# Altium PCB PCB1.PcbDoc (part 1 of 2)
Units mil, origin at the board's own origin, x right, y up, seen from the top; angles counter-clockwise.
Board outline 6000 x 4000 mil, 2 copper layers (Top Layer, Bottom Layer); 288 components, 201 nets, 886 pads, 6 vias.
Unrouted connection lines stored in the file: 611.
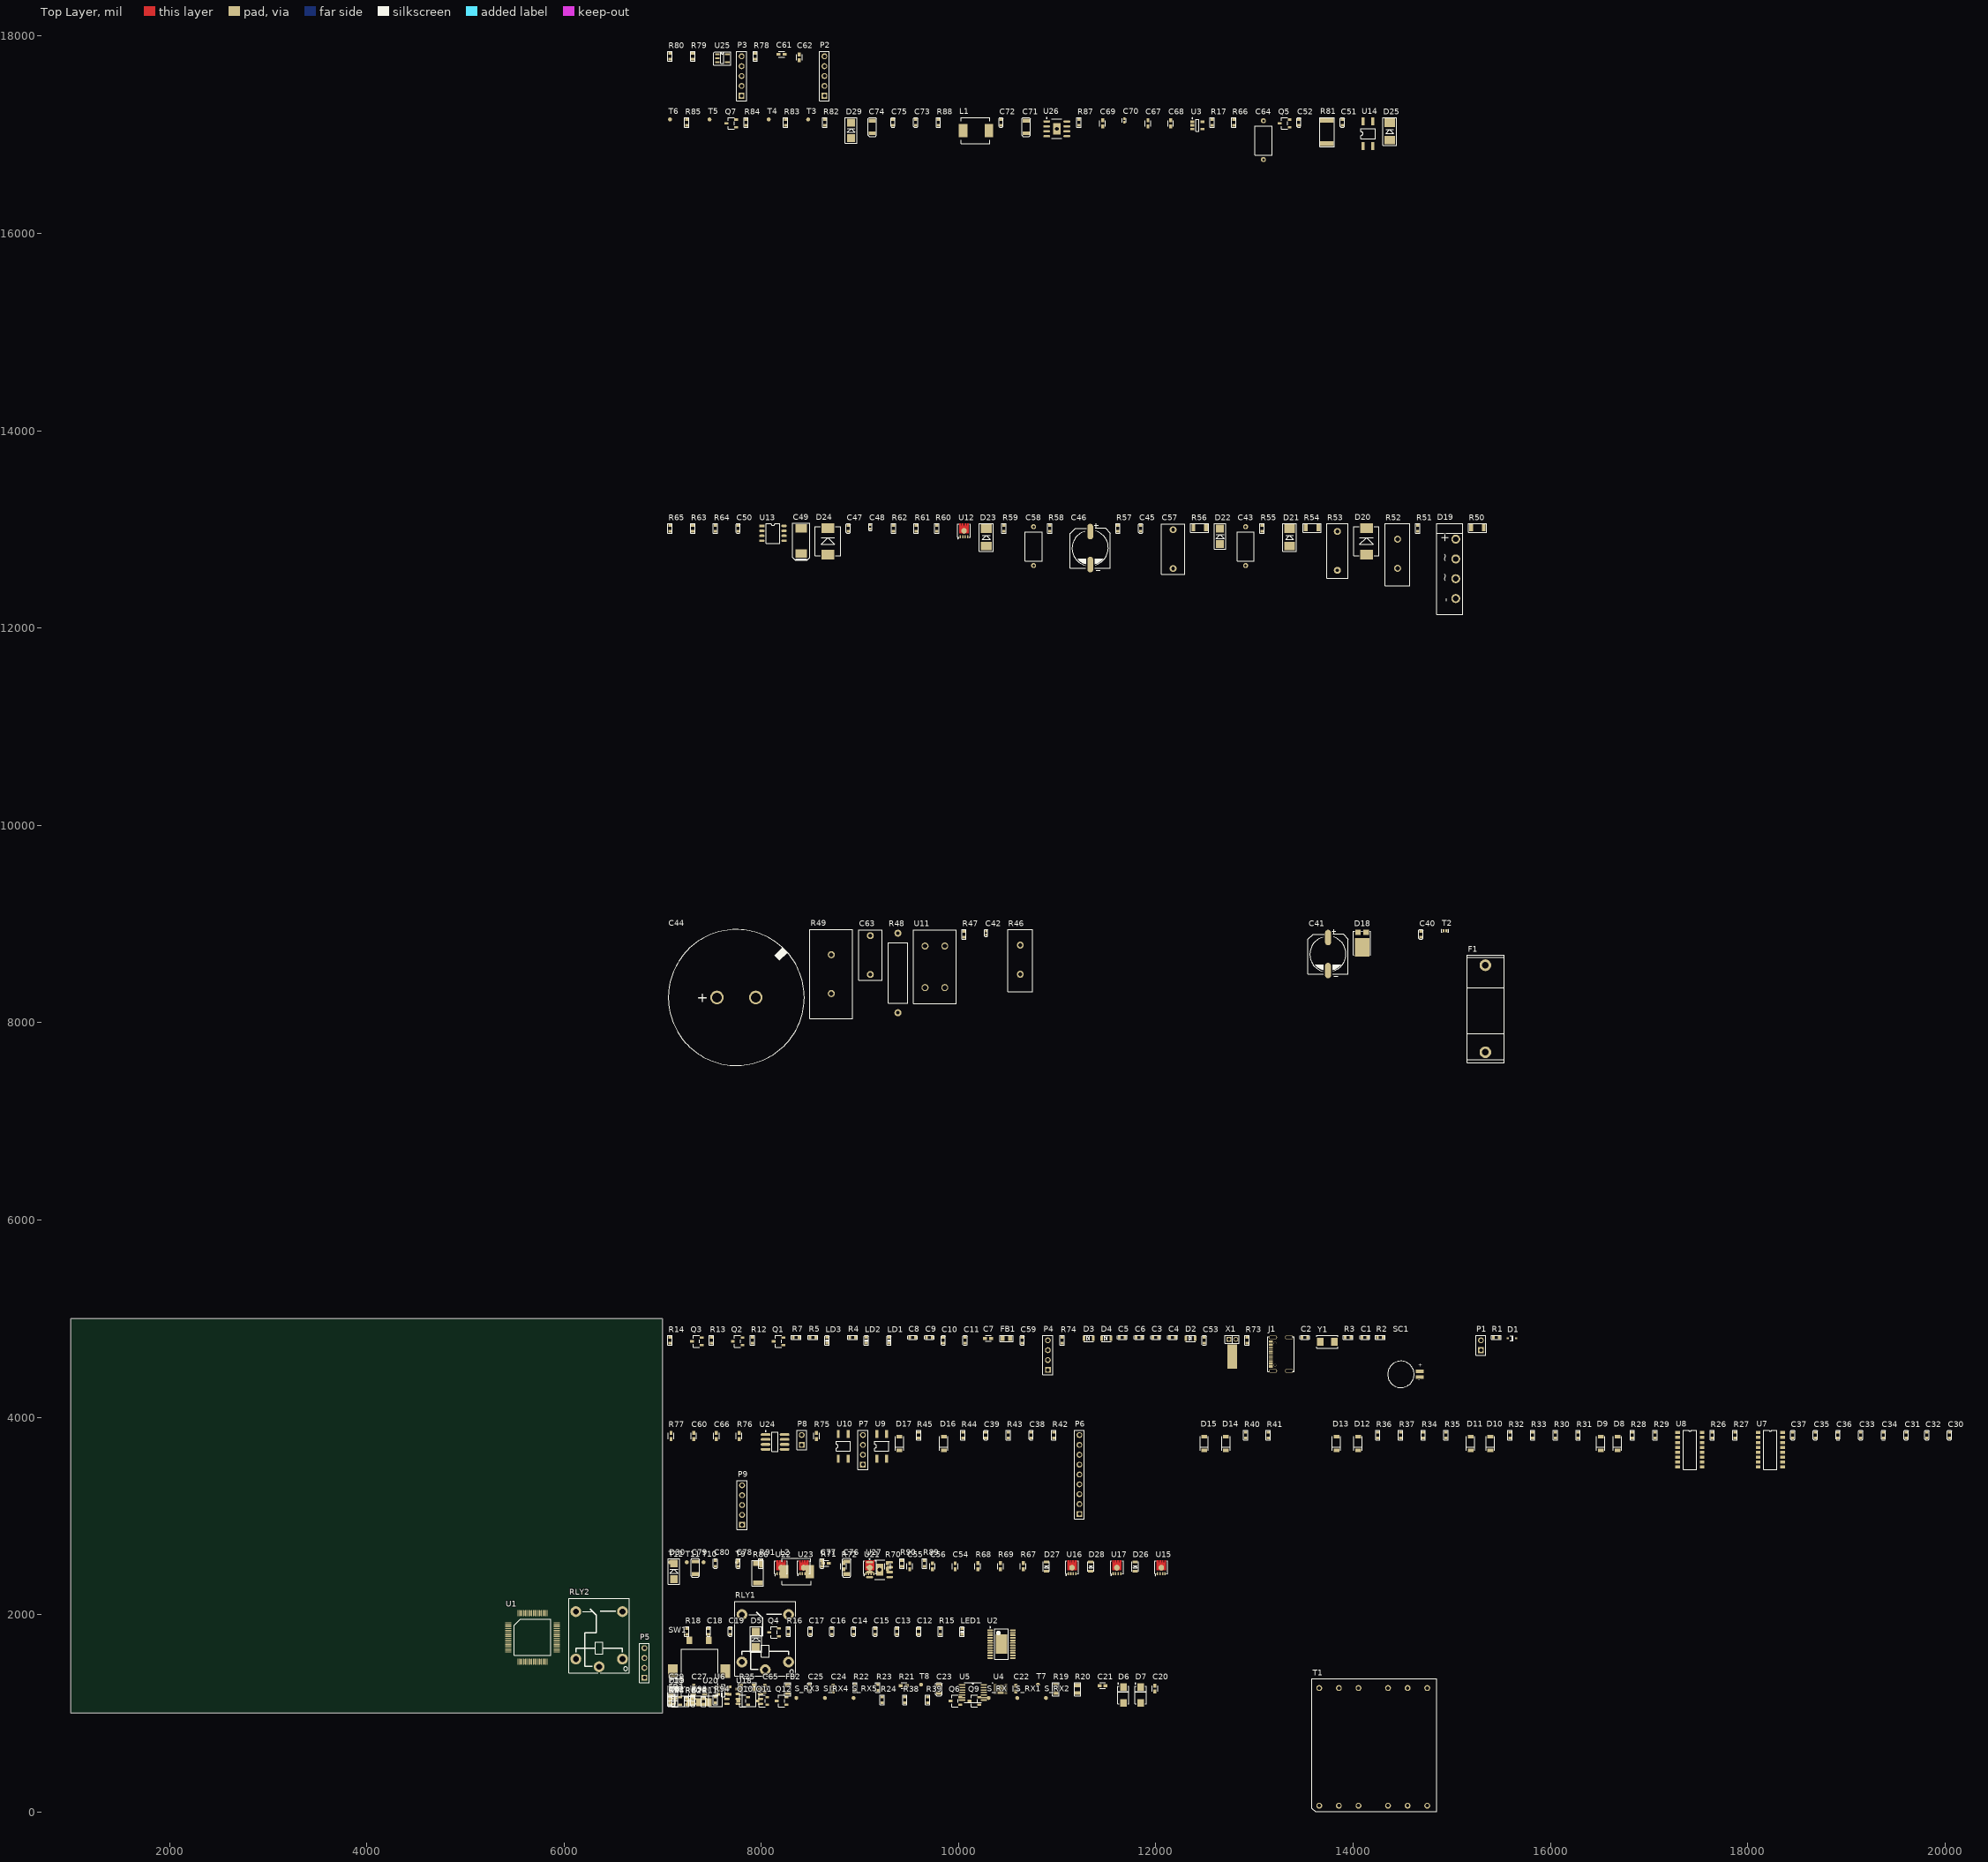
[diagram p0: Top Layer view]
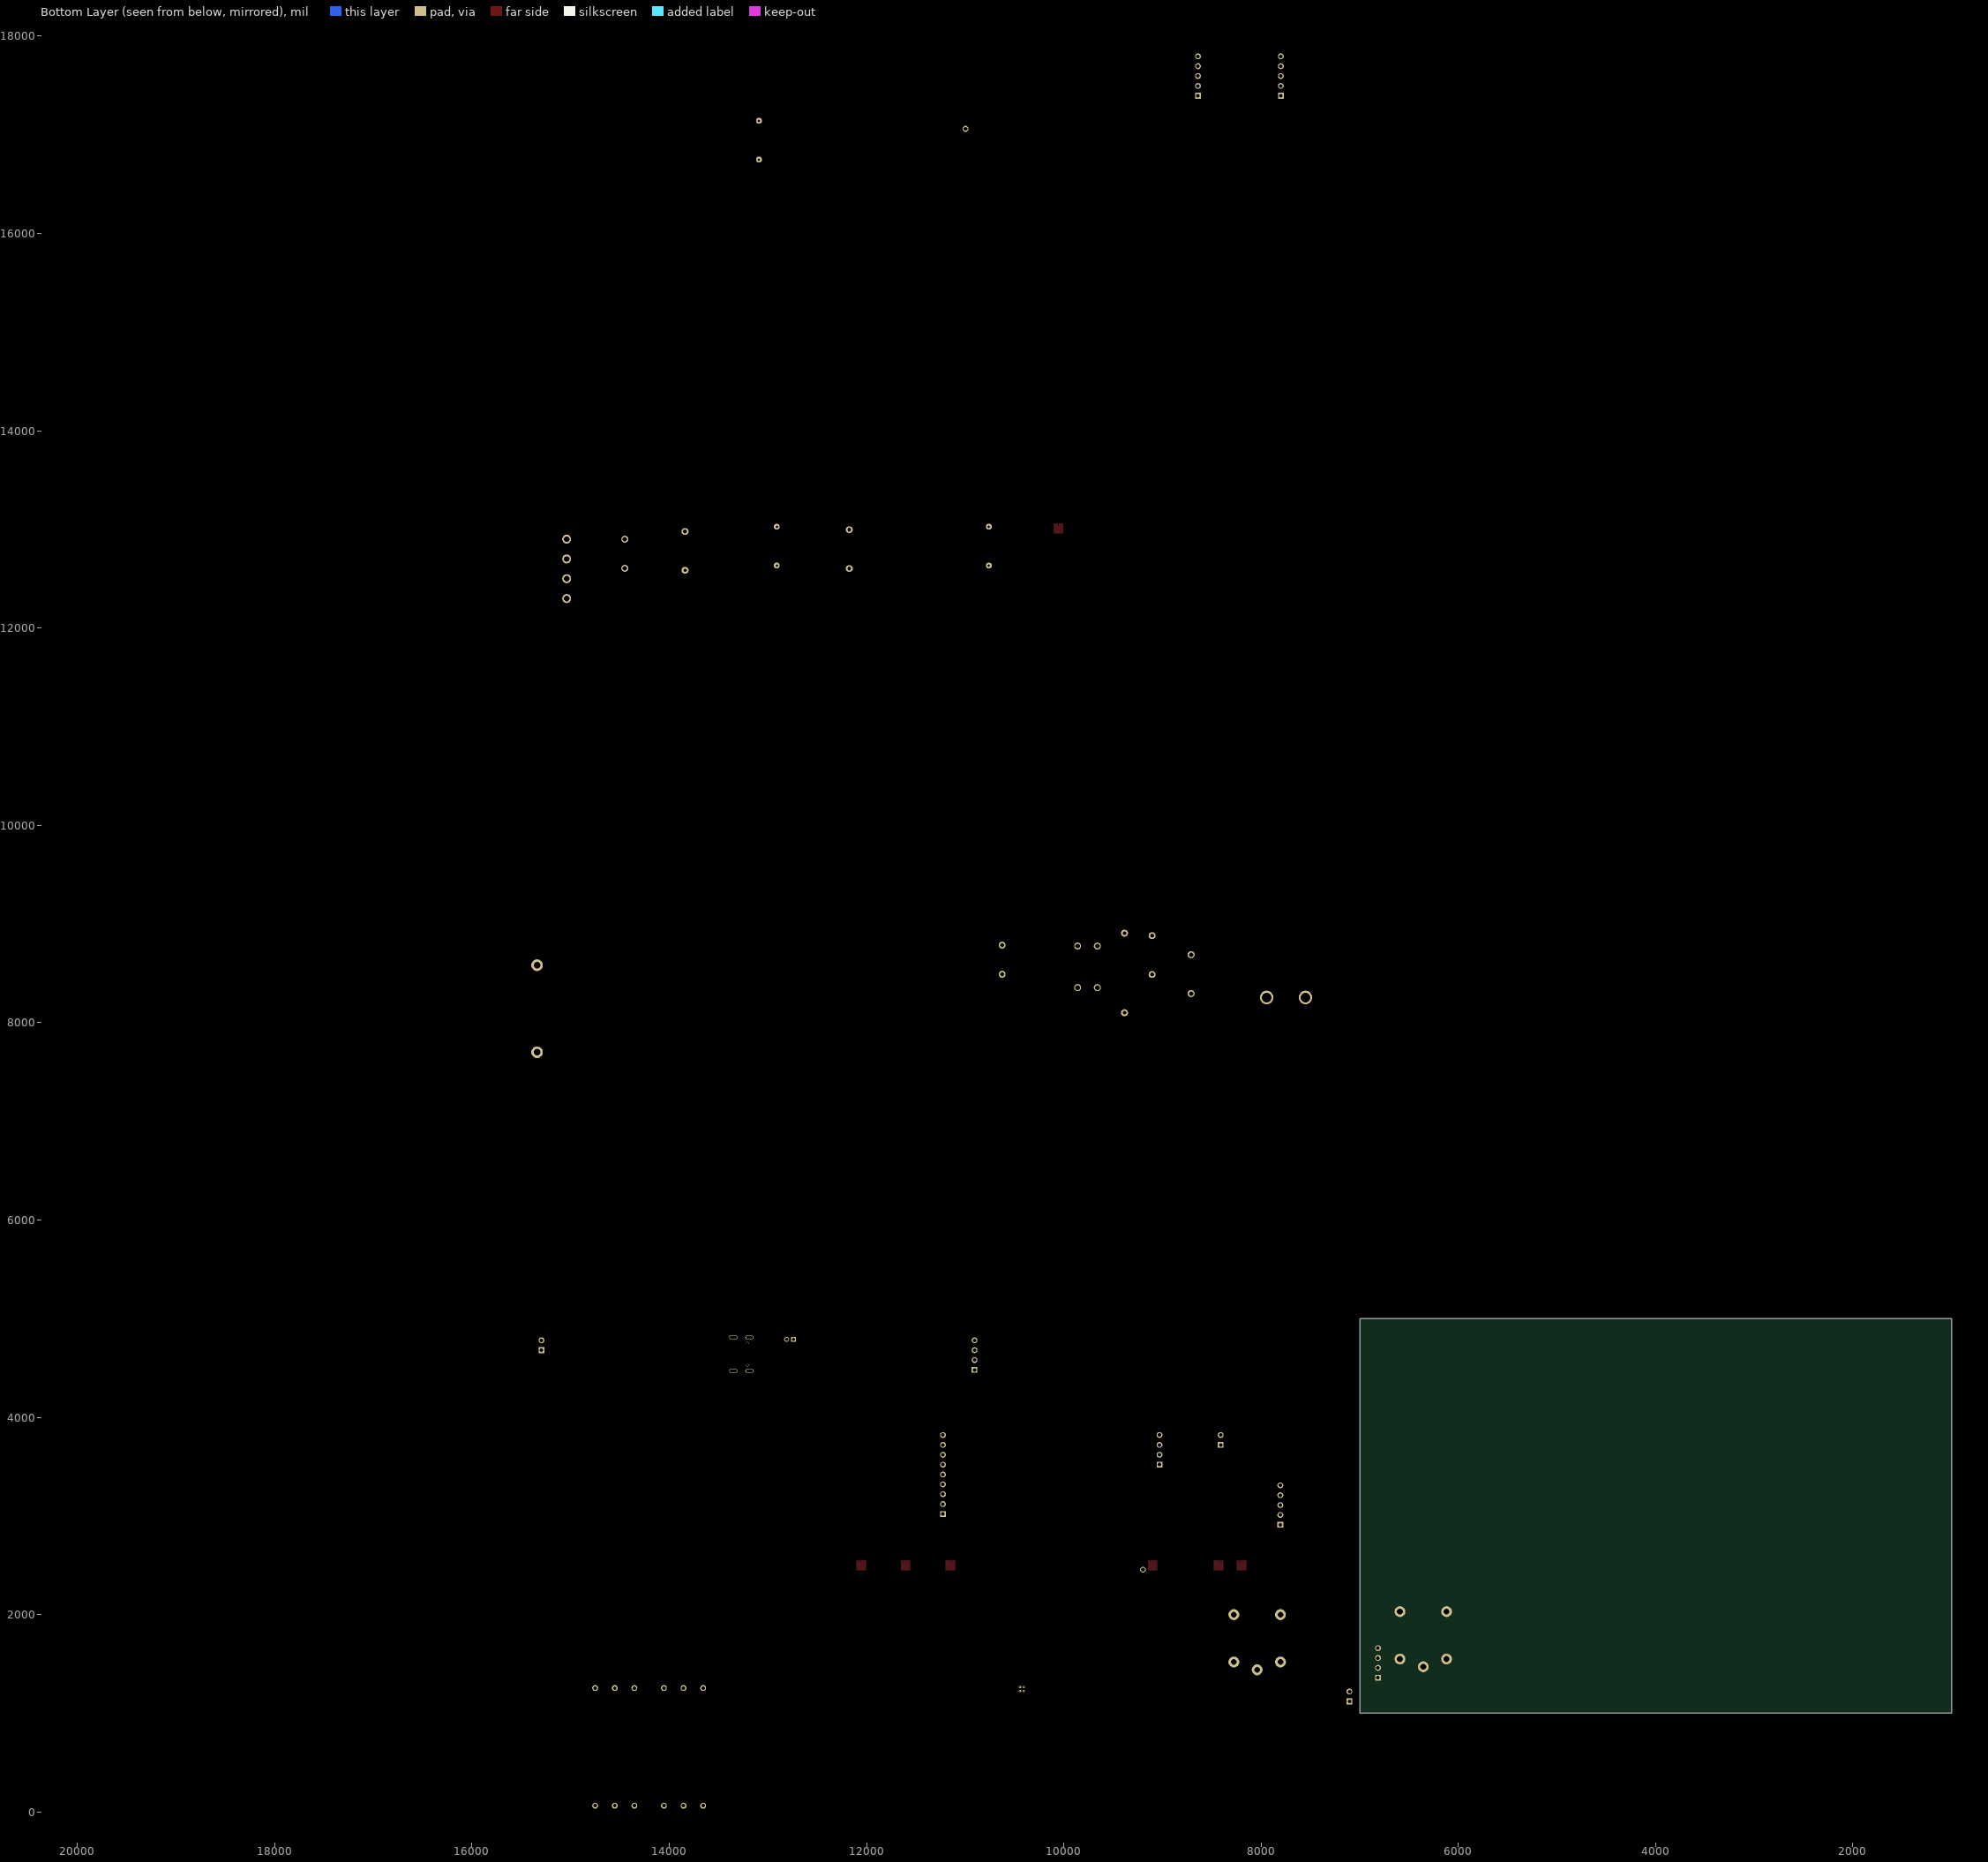
[diagram p1: Bottom Layer view, seen from below]

## Layer stack, top to bottom
Top Solder: solder mask 0.4, Solder Resist, Dk 3.5
Top Layer: signal copper 1.4
Dielectric 1: dielectric 12.6, FR-4, Dk 4.8
Bottom Layer: signal copper 1.4
Bottom Solder: solder mask 0.4, Solder Resist, Dk 3.5

## Board outline
1000,1000 7000,1000 7000,5000 1000,5000

## Design rules (kind name [scope] priority, off if disabled: settings)
Clearance [All] p1: gap=10 ignorepadtopadclearanceinfootprint=FALSE except(0: Arc-Hole Track-Hole SMDPad-Hole THPad-Hole Via-Hole Fill-Hole Poly-Hole Region-Hole Text-Hole)
DiffPairsRouting [All] p1: maxlimit=10 minlimit=10 mostfreqgap=10 toplayer_minwidth=15 toplayer_maxwidth=15 toplayer_prefwidth=15 bottomlayer_minwidth=15 bottomlayer_maxwidth=15 bottomlayer_prefwidth=15 maxuncoupledlength=500
PolygonConnect [All] p1: connectstyle=Relief reliefconductorwidth=10 reliefentries=4 polygonreliefangle="90 Angle" airgapwidth=10
RoutingVias [All] p1: holewidth=28 width=50 viastyle="Through Hole" minholewidth=28 minwidth=50 maxholewidth=28 maxwidth=50
SolderMaskExpansion [All] p1: expansion=4 istentingtop=FALSE
Width [All] p1: maxlimit=10 minlimit=10 preferedwidth=10
29 further rules are at their usual default settings.

## Classes and differential pairs
component class 无极性旋钮: C26 C28 R6 R8 R9 R10 R11 SW1
component class sensor: P2 P3 Q8 Q9 Q10 Q11 Q12 R38 R39 R92 R93 R94 S_RX1 S_RX2 S_RX3 S_RX4 S_RX5
component class power: C40 C41 C42 C43 C44 C45 C46 C47 C48 C49 C50 C51 C52 C57 C58 C63 C64 C67 C68 C69 C70 C71 C72 C73 C74 C75 C76 C77 C78 C79 C80 D18 D19 D20 D21 D22 D23 D24 D25 D29 D30 F1 L1 L2 P10 Q5 Q7 R17 R46 R47 R48 R49 R50 R51 R52 R53 R54 R55 R56 R57 R58 R59 R60 R61 R62 R63 R64 R65 R66 R81 R82 R83 R84 R85 R87 R88 R89 R90 R91 T1 T2 T3 T4 T5 T6 U3 U11 U12 U13 U14 U26 U27
component class mcu: C1 C2 C3 C4 C5 C6 C7 C8 C9 C10 C11 C53 C59 D1 D2 D3 D4 FB1 J1 LD1 LD2 LD3 P1 P4 Q1 Q2 Q3 R1 R2 R3 R4 R5 R7 R12 R13 R14 R73 R74 SC1 U1 X1 Y1
component class DI_DO: C30 C31 C32 C33 C34 C35 C36 C37 C38 C39 C60 C66 D8 D9 D10 D11 D12 D13 D14 D15 D16 D17 P6 P7 P8 R26 R27 R28 R29 R30 R31 R32 R33 R34 R35 R36 R37 R40 R41 R42 R43 R44 R45 R75 R76 R77 RLY1 RLY2 U7 U8 U9 U10 U24
component class blds: C54 C55 C56 C61 C62 D26 D27 D28 FB3 P9 R67 R68 R69 R70 R71 R72 R78 R79 R80 R86 T9 T10 T11 T12 U15 U16 U17 U18 U19 U20 U21 U22 U23 U25
component class ao: C12 C13 C14 C15 C16 C17 C18 C19 D5 LED1 P5 Q4 R15 R16 R18 U2
component class ai: C20 C21 C22 C23 C24 C25 C27 C29 C65 D6 D7 FB2 R19 R20 R21 R22 R23 R25 T7 T8 U4 U5 U6
differential pair USB: +USB_P -USB_N

## Components (designator, comment, footprint, x,y, rotation, side; value= is the part's Value field where it differs from the comment)
C1 "20pF/25V" 0603C 14090,4810 r0 top value=20pF/50V
C2 "20pF/25V" 0603C 13480,4810 r0 top value=20pF/50V
C3 "1uF/25V" 0603C 11970,4810 r0 top value=1u/50V
C4 "0.1uF/50V" 0603C 12140,4810 r0 top
C5 "4.7pF" 0603C 11630,4810 r0 top value=6.8pF
C6 "4.7pF" 0603C 11800,4810 r0 top
C7 "Capacitor_0603" CAPC1608X092N_0603 10300,4800 r0 top value=10u
C8 "0.1uF/50V" 0603C 9505,4810 r0 top value=22nF
C9 "0.1uF/50V" 0603C 9675,4810 r0 top value=22nF
C10 "0.1uF/50V" 0603C 9845,4750 r90 top value=22nF
C11 "0.1uF/50V" 0603C 10065,4750 r90 top value=22nF
C12 "0.01uF" 0603C 9595,1800 r90 top
C13 "0.01uF" 0603C 9375,1800 r90 top
C14 "0.01uF" 0603C 8935,1800 r90 top
C15 "0.1uF" 0603C 9155,1800 r90 top
C16 "0.1uF" 0603C 8715,1800 r90 top
C17 "0.1uF" 0603C 8495,1800 r90 top
C18 "0.01uF" 0603C 7465,1800 r90 top
C19 "0.1uF" 0603C 7685,1800 r90 top
C20 "Capacitor_0603" CAPC1608X092N_0603 11990,1250 r90 top value=0.1u
C21 "Capacitor_0603" CAPC1608X092N_0603 11460,1280 r0 top value=0.1u
C22 "Capacitor_0603" CAPC1608X092N_0603 10580,1250 r90 top value=0.1u
C23 "220nF" 0805C 9800,1205 r90 top
C24 "Capacitor_0603" CAPC1608X092N_0603 8730,1250 r90 top value=0.1u
C25 "0.1uF" 0603C 8490,1230 r90 top
C26 "10nF" 0603C 7305,1090 r90 top
C27 "Capacitor_0603" CAPC1608X092N_0603 7315,1250 r90 top value=0.1u
C28 "10nF" 0603C 7075,1090 r90 top
C29 "Capacitor_0603" CAPC1608X092N_0603 7085,1250 r90 top value=10u
C30 "10nF/50V" 0603C 20045,3790 r90 top value=22nF
C31 "10nF/50V" 0603C 19605,3790 r90 top value=22nF
C32 "10nF/50V" 0603C 19815,3790 r90 top value=22nF
C33 "10nF/50V" 0603C 19145,3790 r90 top value=22nF
C34 "10nF/50V" 0603C 19375,3790 r90 top value=22nF
C35 "10nF/50V" 0603C 18685,3790 r90 top value=22nF
C36 "10nF/50V" 0603C 18915,3790 r90 top value=22nF
C37 "10nF/50V" 0603C 18455,3790 r90 top value=22nF
C38 "0.1uF" 0603C 10735,3790 r90 top
C39 "0.1uF" 0603C 10275,3790 r90 top
C40 "Capacitor_0603" 0603c 14685,8865 r90 top
C41 "UUD1V470MCL1GS" Φ10×10 13745,8695 r0 top value=220uF/50V
C42 "Capacitor_0603" 0402c 10280,8890 r90 top
C43 "KY1102M400VAC70Y10093" CAP-TH_L7.5-W4.5-P10.00-D0.6 12910,12830 r90 top value=22nF
C44 "390uF/50V" LGX2H391MELC50 7550,8255 r0 top value=220uF/50V
C45 "Capacitor_0603" 0603c 11845,12980 r90 top
C46 "UUD1V470MCL1GS" Φ10×10 11335,12810 r0 top value=220uF/50V
C47 "Capacitor_0603" 0603c 8880,12980 r90 top
C48 "Capacitor_0603" 0402c 9105,13005 r90 top
C49 "25TQC15MYFD" 7343 8405,12755 r90 top value=220uF/50V
C50 "Capacitor_0603" 0603c 7765,12980 r90 top
C51 "Capacitor_0603" 0603c 13890,17095 r90 top
C52 "Capacitor_0603" 0603c 13450,17095 r90 top
C53 "0.1uF/50V" 0603C 12490,4750 r90 top
C54 "10uF/50V" CAPC1608X092N_0603 9965,2490 r90 top value=4.7pF
C55 "10uF/50V" CAPC1608X092N_0603 9505,2490 r90 top value=4.7pF
C56 "10uF/50V" CAPC1608X092N_0603 9735,2490 r90 top value=4.7pF
C57 "PX154K2C1002" CAP-TH_L13.0-W6.0-P10.00-D0.6 12175,12800 r90 top value=22nF
C58 "KY1102M400VAC70Y10093" CAP-TH_L7.5-W4.5-P10.00-D0.6 10760,12830 r90 top value=22nF
C59 "0.1uF/50V" 0603C 10645,4750 r90 top
C60 "Capacitor_0603" CAPC1608X092N_0603 7315,3810 r90 top value=0.1u
C61 "Capacitor_0603" CAPC1608X092N_0603 8205,17815 r0 top value=0.1uF/50V
C62 "Capacitor_0603" CAPC1608X092N_0603 8385,17785 r90 top value=10uF/25V
C63 "PX154K2C1002" CAP-TH_L13.0-W6.0-P10.00-D0.6 9105,8685 r90 top value=22nF
C64 "KY1102M400VAC70Y10093" CAP-TH_L7.5-W4.5-P10.00-D0.6 13090,16945 r90 top value=22nF
C65 "Capacitor_0603" CAPC1608X092N_0603 8035,1250 r90 top value=0.1u
C66 "Capacitor_0603" CAPC1608X092N_0603 7545,3810 r90 top value=0.1u
C67 "Capacitor_0603" CAPC1608X092N_0603 11920,17115 r90 top value=0.1u
C68 "Capacitor_0603" CAPC1608X092N_0603 12150,17115 r90 top value=10u
C69 "Capacitor_0603" CAPC1608X092N_0603 11460,17115 r90 top value=10u
C70 "Capacitor_0402" CAPC1005X056N_0402 11680,17145 r90 top value=0.1u
C71 "Capacitor_1206" 1206C 10685,17015 r90 top value=10u/50V
C72 "0.01uF" 0603C 10430,17095 r90 top value=0.01u/50V
C73 "0.1uF" 0603C 9565,17095 r90 top value=0.1uF/50V
C74 "22uF/25V" 1206C 9125,17015 r90 top
C75 "0.1uF" 0603C 9335,17095 r90 top value=0.1uF/50V
C76 "Capacitor_1206" 1206C 8865,2410 r90 top value=10u/50V
C77 "0.01uF" 0603C 8615,2490 r90 top value=0.01u/50V
C78 "0.1uF" 0603C 7765,2490 r90 top value=0.1uF/50V
C79 "22uF/25V" 1206C 7330,2410 r90 top
C80 "0.1uF" 0603C 7535,2490 r90 top value=0.1uF/50V
D1 "BZT52C12S-7-F" DIOD-SOD323-2_V 15610,4800 r0 top
D2 "CESDB5V0D3" SOD323 12305,4800 r0 top
D3 "CESDB5V0D3" SOD323 11270,4800 r0 top
D4 "CESDB5V0D3" SOD323 11450,4800 r0 top value=0.1uF/50V
D5 "SS36" sma 7945,1670 r90 top
D6 "SS14" DO-214AC 11670,1185 r90 top
D7 "SS14" DO-214AC 11845,1185 r90 top
D8 "LL4148" DO-213AB/LL34/MiniMELF 16680,3735 r90 top
D9 "LL4148" DO-213AB/LL34/MiniMELF 16510,3735 r90 top
D10 "LL4148" DO-213AB/LL34/MiniMELF 15390,3735 r90 top
D11 "LL4148" DO-213AB/LL34/MiniMELF 15190,3735 r90 top
D12 "LL4148" DO-213AB/LL34/MiniMELF 14050,3735 r90 top
D13 "LL4148" DO-213AB/LL34/MiniMELF 13830,3735 r90 top
D14 "LL4148" DO-213AB/LL34/MiniMELF 12710,3735 r90 top
D15 "LL4148" DO-213AB/LL34/MiniMELF 12490,3735 r90 top
D16 "LL4148" DO-213AB/LL34/MiniMELF 9850,3735 r90 top
D17 "LL4148" DO-213AB/LL34/MiniMELF 9400,3735 r90 top
D18 "SVT12100VB_R2_00001" TO-277B_3P-L6.1-W4.3-LS7.0-BR 14090,8840 r90 top
D19 "KBU1008" KBU_4P-L23.2-W6.8-P5.10 15040,12600 r90 top
D20 "ES3J" SMC 14135,12745 r90 top
D21 "MBRS130LT3G" SMB 13355,12830 r90 top
D22 "MRA4003T3G" SMA 12650,12850 r90 top
D23 "MBRS130LT3G" SMB 10280,12830 r90 top
D24 "SMCJ30CA" SMC 8675,12745 r90 top
D25 "MBRS130LT3G" SMB 14370,16945 r90 top
D26 "1N4148WS" SOD323 11790,2440 r90 top value=LL4148
D27 "1N4148WS" SOD323 10890,2440 r90 top value=LL4148
D28 "1N4148WS" SOD323 11340,2440 r90 top value=LL4148
D29 "SS34" SMA 8910,16965 r90 top
D30 "SS34" SMA 7115,2360 r90 top
F1 "2A/250V" 可视开关电源保险丝座 15340,7700 r90 top
FB1 "JWWBW2012 M600HT" 0805R 10445,4800 r0 top
FB2 "JWWBW2012 M600HT" 0805R 8270,1205 r90 top
FB3 "JWWBW2012 M600HT" 0805R 7085,1100 r90 top
J1 "TYPE C_16P" TYPEC_16P 13335,4640 r90 top
L1 "HPPC06030-100M-Q8" IND-SMD-L7.3-W6 10045,17040 r0 top
L2 "HPPC06030-100M-Q8" IND-SMD-L7.3-W6 8230,2435 r0 top
LD1 "LED_Green_19-217" 0603led 9295,4750 r90 top value=19-217/G7C-AN1P2/3T
LD2 "LED_Green_19-217" 0603led 9065,4750 r90 top value=19-217/G7C-AN1P2/3T
LD3 "LED_Green_19-217" 0603led 8665,4750 r90 top value=19-217/G7C-AN1P2/3T
LED1 "LED" 0603LED 10035,1800 r90 top
P1 "Header 2" HDR1X2 15295,4680 r90 top
P2 "Header 5" HDR1X5 8640,17395 r90 top
P3 "Header 5" HDR1X5 7800,17395 r90 top
P4 "Header 4" HDR1X4 10905,4480 r90 top
P5 "Header 4" HDR1X4 6815,1360 r90 top
P6 "Header 9" HDR1X9 11225,3020 r90 top
P7 "Header 4" HDR1X4 9030,3520 r90 top
P8 "Header 2" HDR1X2 8410,3720 r90 top
P9 "Header 5" HDR1X5 7805,2910 r90 top
P10 "Header 2" HDR1X2 7105,1120 r90 top
Q1 "MMBT3904" SOT23-3 8225,4730 r0 top
Q2 "MMBT3904" SOT23-3 7810,4730 r0 top
Q3 "MMBT3904" SOT23-3 7395,4730 r0 top
Q4 "MMBT3904" SOT23-3 8180,1780 r0 top
Q5 "TLV431BIDBZT" SOT23-3 13355,17075 r0 top
Q6 "SI2306" SOT23-3 10015,1085 r0 top
Q7 "TLV431BIDBZT" SOT23-3 7745,17075 r0 top
Q8 "SI2306" SOT23-3 7175,1085 r0 top
Q9 "SI2306" SOT23-3 10210,1085 r0 top
Q10 "SI2306" SOT23-3 7865,1085 r0 top
Q11 "SI2306" SOT23-3 8060,1085 r0 top
Q12 "SI2306" SOT23-3 8255,1085 r0 top
R1 "1K" 0603R 15420,4810 r0 top
R2 "10K" 0603R 14245,4810 r0 top value=10k/1%
R3 "100K" 0603R 13920,4810 r0 top value=10k/1%
R4 "1K" 0603r 8895,4810 r0 top
R5 "1K" 0603r 8495,4810 r0 top
R6 "4.7K" 0603R 7075,1150 r0 top
R7 "1K" 0603r 8325,4810 r0 top
R8 "10K" 0603R 7245,1150 r0 top
R9 "10K" 0603R 7075,1150 r0 top
R10 "10K" 0603R 7245,1090 r90 top
R11 "10K" 0603R 7415,1090 r90 top
R12 "1K" 0603r 7910,4750 r90 top
R13 "1K" 0603r 7495,4750 r90 top
R14 "1K" 0603r 7075,4750 r90 top
R15 "1.5K" 0603R 9815,1800 r90 top
R16 "15K/0.1%" 0603R 8275,1800 r90 top
R17 "Resistor_0603" 0603R 12570,17095 r90 top value=1k/1%
R18 "1K" 0603R 7245,1800 r90 top
R19 "49.9R_1%" 0805R 10985,1205 r90 top
R20 "49.9R_1%" 0805R 11205,1205 r90 top
R21 "Resistor_0603" RESC1608X055N_0603 9445,1280 r0 top value=10k
R22 "51K" 0603R 8950,1230 r90 top
R23 "51K" 0603R 9180,1230 r90 top
R24 "10K" 0603R 9225,1105 r90 top value=10R
R25 "0" 1206R 7795,1265 r0 top
R26 "3.3K" 0603R 17640,3790 r90 top
R27 "5.1K" 0603R 17870,3790 r90 top
R28 "3.3K" 0603R 16830,3790 r90 top
R29 "5.1K" 0603R 17060,3790 r90 top
R30 "3.3K" 0603R 16050,3790 r90 top
R31 "5.1K" 0603R 16280,3790 r90 top
R32 "3.3K" 0603R 15590,3790 r90 top
R33 "5.1K" 0603R 15820,3790 r90 top
R34 "3.3K" 0603R 14710,3790 r90 top
R35 "5.1K" 0603R 14940,3790 r90 top
R36 "3.3K" 0603R 14250,3790 r90 top
R37 "5.1K" 0603R 14480,3790 r90 top
R38 "10K" 0603R 9455,1105 r90 top value=10R
R39 "10K" 0603R 9685,1105 r90 top value=10R
R40 "3.3K" 0603R 12910,3790 r90 top
R41 "5.1K" 0603R 13140,3790 r90 top
R42 "51K" 0603R 10965,3790 r90 top
R43 "51K" 0603R 10505,3790 r90 top
R44 "510" 0603R 10045,3790 r90 top
R45 "510" 0603R 9595,3790 r90 top
R46 "14D561K" 14D561K 10625,8490 r90 top
R47 "6.8K" 0603R 10055,8865 r90 top
R48 "1MΩ/2W" 5x15.5 9385,8100 r90 top value=100K
R49 "20D471K" 20D471K 8710,8295 r90 top
R50 "CRCW12062M26FKEA" 1206R 15195,13015 r0 top
R51 "13.3" 0603R 14655,12980 r90 top
R52 "14D561K" 14D561K 14450,12605 r90 top
R53 "B5G3600" B5G3600 13840,12585 r90 top
R54 "CRCW12062M26FKEA" 1206R 13520,13015 r0 top
R55 "4.99/1%" 0603R 13075,12980 r90 top
R56 "CRCW12062M26FKEA" 1206R 12380,13015 r0 top
R57 "210K/1%" 0603R 11615,12980 r90 top
R58 "261k" 0603R 10925,12980 r90 top
R59 "75k" 0603R 10460,12980 r90 top
R60 "4.7" 0603R 9780,12980 r90 top
R61 "20.5K" 0603R 9570,12980 r90 top
R62 "1.96k" 0603R 9340,12980 r90 top
R63 "18.7K" 0603R 7305,12980 r90 top
R64 "54.9K" 0603R 7535,12980 r90 top
R65 "1K" 0603R 7075,12980 r90 top
R66 "4.12K" 0603R 12790,17095 r90 top
R67 "Resistor_0603" RESC1608X055N_0603 10655,2490 r90 top value=100
R68 "Resistor_0603" RESC1608X055N_0603 10195,2490 r90 top value=100
R69 "Resistor_0603" RESC1608X055N_0603 10425,2490 r90 top value=100
R70 "Resistor_0603" RESC1608X055N_0603 9280,2490 r90 top value=100
R71 "Resistor_0603" RESC1608X055N_0603 8655,2520 r0 top value=100
R72 "Resistor_0603" RESC1608X055N_0603 8835,2490 r90 top value=100
R73 "49.9" 0603R 12925,4750 r90 top value=10k/1%
R74 "10K" 0603R 11050,4750 r90 top value=10k/1%
R75 "Resistor_0603" RESC1608X055N_0603 8560,3810 r90 top value=10k
R76 "Resistor_0603" RESC1608X055N_0603 7775,3810 r90 top value=100
R77 "Resistor_0603" RESC1608X055N_0603 7085,3810 r90 top value=10k
R78 "" 0603R 7940,17765 r90 top value=470K/%1
R79 "" 0603R 7305,17765 r90 top value=10K/1%
R80 "" 0603R 7075,17765 r90 top value=10K/1%
R81 "50mR" 2512R 13735,16910 r90 top
R82 "100/0.1%" 0603R 8645,17095 r90 top
R83 "1K/0.1%" 0603R 8245,17095 r90 top value=20K/0.1%
R84 "1K/0.1%" 0603R 7845,17095 r90 top value=200/0.1%
R85 "1K/0.1%" 0603R 7245,17095 r90 top value=20K/0.1%
R86 "0.1" 2010R 7965,2320 r90 top
R87 "Resistor_0603" 0603R 11220,17095 r90 top value=2.9k/1%
R88 "100K" 0603R 9795,17095 r90 top
R89 "Resistor_0603" 0603R 9655,2490 r90 top value=1k/1%
R90 "Resistor_0603" 0603R 9425,2490 r90 top value=17.75k/1%
R91 "100K" 0603R 7995,2490 r90 top
R92 "10K" 0603R 7075,1105 r90 top value=10R
R93 "10K" 0603R 7305,1105 r90 top value=10R
R94 "10K" 0603R 7535,1105 r90 top value=10R
RLY1 "SRD-05VDC-SL-C" RELAY-TH_SRD-XXVDC-XL-C 8040,1720 r90 top
RLY2 "SRD-05VDC-SL-C" RELAY-TH_SRD-XXVDC-XL-C 6356.2,1750.47 r90 top
S_RX "TP" TPD 10305,1155 r90 top
S_RX1 "TP" TPD 10595,1155 r90 top
S_RX2 "TP" TPD 10885,1155 r90 top
S_RX3 "TP" TPD 8355,1155 r90 top
S_RX4 "TP" TPD 8645,1155 r90 top
S_RX5 "TP" TPD 8935,1155 r90 top
SC1 "1.5F/5.5V" CAP-TH_DMS3R3224 14675,4435 r0 top value=100pF
SW1 "RE1103" EX1103S-D2-10 7370,1425 r0 top
T1 "PQ230" pq3230 13656.18,62.5 r0 top
T2 "TEST_P" TEST_P 14915,8930 r0 top
T3 "TP" TPD 8475,17155 r0 top
T4 "TP" TPD 8075,17155 r0 top
T5 "TP" TPD 7475,17155 r0 top
T6 "TP" TPD 7075,17155 r0 top
T7 "TP" TPD 10805,1290 r0 top
T8 "TP" TPD 9620,1290 r0 top
T9 "TP" TPD 7755,2530 r0 top
T10 "TP" TPD 7415,2530 r0 top
T11 "TP" TPD 7245,2530 r0 top
T12 "TP" TPD 7075,2530 r0 top
U1 "STM32G431RBT6" LQFP-64 5434.72,1916.57 r0 top
U2 "AD5410AREZ-REEL7" AD5410AREZ-REEL7 10435,1700 r0 top
U3 "ME6119A33M5G" MCRN-SOT23-5_V 12420,17095 r0 top
U4 "LTC2470CDD#TRPBF" LT-DD-12_V 10425,1245 r0 top
U5 "TLV2454IPW" TSSOP14 10145,1210 r0 top
U6 "LP2981-33DBVR" DBV0005A_M 7615,1230 r0 top
U7 "TLP291-4" SOP16-T 18105,3845 r0 top
U8 "TLP291-4" SOP16-T 17290,3845 r0 top
U9 "AQY210S" sop4 9170,3580 r90 top
U10 "AQY210S" sop4 8780,3580 r90 top
U11 "FL2D-30-222" TY-100P 9660,8355 r90 top
U12 "SIS110DN-T1-GE3" DFN-8_L3.3-W3.3-P0.65-BL-2 10055,12955 r0 top
U13 "UCC28600DR" so-8 8005,13035 r0 top
U14 "TCMT1107" sop4 14100,16885 r90 top
U15 "SIS110DN-T1-GE3" DFN-8_L3.3-W3.3-P0.65-BL-2 12055,2445 r0 top
U16 "SIS110DN-T1-GE3" DFN-8_L3.3-W3.3-P0.65-BL-2 11150,2445 r0 top
U17 "SIS110DN-T1-GE3" DFN-8_L3.3-W3.3-P0.65-BL-2 11605,2445 r0 top
U18 "IRS21867STRPBF" SO-8 7765,1245 r0 top
U19 "IRS21867STRPBF" SO-8 7085,1245 r0 top
U20 "IRS21867STRPBF" SO-8 7425,1245 r0 top
U21 "SIS110DN-T1-GE3" DFN-8_L3.3-W3.3-P0.65-BL-2 9100,2445 r0 top
U22 "SIS110DN-T1-GE3" DFN-8_L3.3-W3.3-P0.65-BL-2 8200,2445 r0 top
U23 "SIS110DN-T1-GE3" DFN-8_L3.3-W3.3-P0.65-BL-2 8430,2445 r0 top
U24 "THVD1400" MAXM-S8+4_M 8140,3750 r0 top value=MAX33071EASA+
U25 "AD8615AUJZ-R2" sot-23-5 7605,17775 r0 top
U26 "LM22676MRX-ADJ/NOPB" SOP127P600X168_HS-8N 10995,17060 r0 top value=LM22676MRE-5.0/NOPB
U27 "LM22676MRX-ADJ/NOPB" SOP127P600X168_HS-8N 9200,2455 r0 top value=LM22676MRE-5.0/NOPB
X1 "32768" A 12740,4790 r0 top
Y1 "8M" CRAY_5032 13665,4765 r0 top

## Footprints (in the part's own frame and the unit in brackets; to place one, negate y for a bottom-side part, rotate by r counter-clockwise, add the part's x,y. Pads: shape width x height; smd on the part's side, far side on the other; paste and mask are expansions set on the pad)
5x15.5 [mm]
  round 1.8 hole 0.9: 1(0,0) 2(20.5,0)
  silkscreen extent 2.5,-2.5 18,2.5
14D561K [mm]
  round 1.8 hole 1.1: 1(0,0) 2(7.5,0)
  silkscreen extent -4.5,-3.21 11.5,3.21
20D471K [mm]
  round 1.8 hole 1.1: 1(0,0) 2(10,0)
  silkscreen extent -6.5,-5.5 16.5,5.5
0402c [mm]
  rect 0.6x0.6 smd: 1(0,0) 2(1,0)
  silkscreen extent -0.4,-0.4 1.4,0.4
0603C [mm]
  rect 0.7x0.85 smd: 1(0,0) 2(1.5,0)
  silkscreen extent -0.5,-0.55 2,0.55
0603c [mm]
  rect 0.7x0.85 smd: 1(0,0) 2(1.5,0)
  silkscreen extent -0.5,-0.55 2,0.55
0603led [mm]
  rect 0.7x0.85 smd: 1(0,0) 2(1.5,0)
  silkscreen extent -0.5,-0.55 2,0.55
0603LED [mm]
  rect 0.7x0.85 smd: 1(0,0) 2(1.5,0)
  silkscreen extent -0.5,-0.55 2,0.55
0603R [mm]
  rect 0.7x0.85 smd: 1(0,0) 2(1.5,0)
  silkscreen extent -0.5,-0.55 2,0.55
0603r [mm]
  rect 0.7x0.85 smd: 1(0,0) 2(1.5,0)
  silkscreen extent -0.5,-0.55 2,0.55
0805C [mm]
  rect 1x1.3 smd: 1(0,0) 2(2,0)
  silkscreen extent -0.7,-0.8 2.7,0.8
0805R [mm]
  rect 1x1.3 smd: 1(0,0) 2(2,0)
  silkscreen extent -0.7,-0.8 2.7,0.8
1206C [mm]
  rect 1x1.8 smd: 1(0,0) 2(3.25,0)
  silkscreen extent -0.8,-1.1 4.05,1.1
1206R [mm]
  rect 1x1.8 smd: 1(0,0) 2(3.25,0)
  silkscreen extent -0.7,-1.1 3.95,1.1
2010R [mm]
  rect 1.2x2.5 smd: 1(0,0) 2(5,0)
  silkscreen extent -0.8,-1.5 5.8,1.5
2512R [mm]
  rect 1.2x3.5 smd: 1(0,0) 2(6,0)
  silkscreen extent -0.75,-1.9 6.75,1.9
7343 [mm]
  rect 2.2x3 smd: 1(0,0) 2(6.5,0)
  silkscreen extent -1.75,-2.25 7.8,2.25
A [mil]
  round 50 hole 32: 1(70,0)
  rect 50x50 hole 32: 2(0,0)
  rect 100x250 smd: 3(34.37,-175)
  silkscreen extent -40,-40 105,40
AD5410AREZ-REEL7 [mm] "SOP, 24-Leads, Body 7.8x4.4mm (max), Pitch 0.65mm, IPC Medium Density"
  oval 1.45x0.45 smd: 1(-2.925,3.575) 2(-2.925,2.925) 3(-2.925,2.275) 4(-2.925,1.625) 5(-2.925,0.975) 6(-2.925,0.325) 7(-2.925,-0.325) 8(-2.925,-0.975) 9(-2.925,-1.625) 10(-2.925,-2.275) 11(-2.925,-2.925) 12(-2.925,-3.575) 13(2.925,-3.575) 14(2.925,-2.925) 15(2.925,-2.275) 16(2.925,-1.625) 17(2.925,-0.975) 18(2.925,-0.325) 19(2.925,0.325) 20(2.925,0.975) 21(2.925,1.625) 22(2.925,2.275) 23(2.925,2.925) 24(2.925,3.575)
  rect 3x5 smd: 25(0,0)
  silkscreen extent -3.05,-3.9 1.8,4.47, body extent -2.2,-3.9 2.2,3.9, height 2.65
B5G3600 [mm]
  round 1.8 hole 0.9: 1(0,0)
  round 1.8 hole 1.1: 2(10,0)
  silkscreen extent -2,-2.75 12,2.75
CAP-TH_DMS3R3224 [mm]
  rect 2x0.9 smd: 1(-0.001,0.749) 2(0.001,-0.749)
  silkscreen extent -8.26,-3.4 -1.46,3.4
CAP-TH_L7.5-W4.5-P10.00-D0.6 [mm]
  round 1.3 / inner round 1.524 / far side round 1.524 hole 0.7: 1(-5,0) 2(5,0)
  silkscreen extent -3.8,-2.2 3.7,2.2
CAP-TH_L13.0-W6.0-P10.00-D0.6 [mm]
  round 1.8 hole 1: 1(-5,0) 2(5,0)
  silkscreen extent -6.5,-3 6.5,3
CAPC1005X056N_0402 [mil] "Chip Capacitor, 0402"
  round 10 on Mech3: 0(0,0)
  rect 25x24 smd mask+1.97: 1(-18.03,0) 2(18.03,0)
  silkscreen extent -20,-20 20,20, body extent -20,-10 20,10, height 22
CAPC1608X092N_0603 [mil] "Chip Capacitor, 0603"
  round 10 on Mech3: 0(0,0)
  rect 40x30 smd: 1(-30.98,0) 2(30,0)
  silkscreen extent -30,-29 30,29, body extent -31,-16 31,16, height 36
CRAY_5032 [mm]
  rect 1.7x2 smd: 1(0,0) 2(3.7,0)
  silkscreen extent -0.86,-1.6 4.55,1.6
DBV0005A_M [mm] "SOT23, 5-Leads, Body 3.05x1.75mm, Pitch 0.95mm, IPC Low Density"
  rrect15% 1.2x0.65 smd: 1(-1.475,0.95) 2(-1.475,0) 3(-1.475,-0.95) 4(1.475,-0.95) 5(1.475,0.95)
  silkscreen extent -1.6,-1.55 0.5,1.95, body extent -1.42,-1.46 1.42,1.46, height 1.08
DFN-8_L3.3-W3.3-P0.65-BL-2 [mm]
  rect 0.35x0.7 smd paste-100 mask+0.051: 1(-0.975,-0.765) 2(-0.325,-0.765) 3(0.325,-0.765) 4(0.975,-0.765)
  oval 1.411x1.499 smd: 5(0,0.765)
  Top Layer region: -1.176,0.187 -1.176,2.115 -1.176,2.685 -0.775,2.685 -0.775,2.115 -0.526,2.115 -0.526,2.685 -0.125,2.685 -0.125,2.115 0.125,2.115 0.125,2.685 0.525,2.685 0.525,2.115 0.774,2.115 0.774,2.685 0.774,2.115 0.774,2.685 1.176,2.685 1.176,2.115 1.176,0.187 -1.176,0.187
  silkscreen extent -1.65,-1.28 1.65,2.48
DIOD-SOD323-2_V [mm] "SOD-323, 2-Leads, Body 1.7x1.3mm, Lead Span 2.5mm"
  rect 0.59x0.45 smd: 1(-1.055,0) 2(1.055,0)
  silkscreen extent -0.56,-0.65 0.26,0.65, body extent -1.21,-0.65 1.31,0.65, height 1.13
DO-213AB/LL34/MiniMELF [mm]
  rect 0.9x1.5 smd: 1(1.75,0) 2(-1.75,0)
  silkscreen extent -1.8,-1.08 1.8,1.08
DO-214AC [mm] "Molded Diode, 2-Leads, Body 4.3x2.7mm, IPC Medium Density"
  rect 1.85x1.7 smd: 1(-2.05,0) 2(2.05,0)
  silkscreen extent -2.3,-1.45 3.07,1.45, body extent -2.3,-1.45 2.3,1.45, height 2.44
EX1103S-D2-10 [mm]
  rect 1.5x2 smd: A(-2.5,-8) B(2.5,-8) C(0,-8) D(-2.5,8) E(2.5,8)
  rect 2.5x3.5 smd: A3(6.75,0) A4(-6.75,0)
  silkscreen extent -4.57,-6.35 4.83,5.71
HDR1X2 [mm] "Connector; Header; 2 Position"
  rect 1.5x1.5 hole 0.9: 1(0,0)
  round 1.5 hole 0.9: 2(2.54,0)
  silkscreen extent -1.27,-1.27 3.81,1.27
HDR1X4 [mm] "Connector; Header; 4 Position"
  rect 1.5x1.5 hole 0.9: 1(0,0)
  round 1.5 hole 0.9: 2(2.54,0) 3(5.08,0) 4(7.62,0)
  silkscreen extent -1.27,-1.27 8.89,1.27
HDR1X5 [mm] "Connector; Header; 5 Position"
  rect 1.5x1.5 hole 0.9: 1(0,0)
  round 1.5 hole 0.9: 2(2.54,0) 3(5.08,0) 4(7.62,0) 5(10.16,0)
  silkscreen extent -1.27,-1.27 11.43,1.27
HDR1X9 [mm] "Connector; Header; 9 Position"
  rect 1.5x1.5 hole 0.9: 1(0,0)
  round 1.5 hole 0.9: 2(2.54,0) 3(5.08,0) 4(7.62,0) 5(10.16,0) 6(12.7,0) 7(15.24,0) 8(17.78,0) 9(20.32,0)
  silkscreen extent -1.27,-1.27 21.59,1.27
IND-SMD-L7.3-W6 [mm]
  rect 2.224x3.42 smd: 1(0,0) 2(6.656,0)
  silkscreen extent -0.48,-3.35 6.93,3.45
KBU_4P-L23.2-W6.8-P5.10 [mm]
  round 2.3 hole 1.4: 1(7.65,0) 2(2.55,0) 3(-2.55,0) 4(-7.65,0)
  silkscreen extent -11.68,-1.78 11.68,4.95
LGX2H391MELC50 [mm]
  round 3.5 hole 2.5: 1(0,0) 2(10,0)
  silkscreen extent -12.5,-17.5 22.5,17.5
LQFP-64 [mm]
  rect 1.6x0.3 smd: 1(0,0)
  oval 1.6x0.3 smd: 2(0,-0.5) 3(0,-1) 4(0,-1.5) 5(0,-2) 6(0,-2.5) 7(0,-3) 8(0,-3.5) 9(0,-4) 10(0,-4.5) 11(0,-5) 12(0,-5.5) 13(0,-6) 14(0,-6.5) 15(0,-7) 16(0,-7.5) 33(12.5,-7.5) 34(12.5,-7) 35(12.5,-6.5) 36(12.5,-6) 37(12.5,-5.5) 38(12.5,-5) 39(12.5,-4.5) 40(12.5,-4) 41(12.5,-3.5) 42(12.5,-3) 43(12.5,-2.5) 44(12.5,-2) 45(12.5,-1.5) 46(12.5,-1) 47(12.5,-0.5) 48(12.5,0)
  oval 0.3x1.6 smd: 17(2.5,-10) 18(3,-10) 19(3.5,-10) 20(4,-10) 21(4.5,-10) 22(5,-10) 23(5.5,-10) 24(6,-10) 25(6.5,-10) 26(7,-10) 27(7.5,-10) 28(8,-10) 29(8.5,-10) 30(9,-10) 31(9.5,-10) 32(10,-10) 49(10,2.5) 50(9.5,2.5) 51(9,2.5) 52(8.5,2.5) 53(8,2.5) 54(7.5,2.5) 55(7,2.5) 56(6.5,2.5) 57(6,2.5) 58(5.5,2.5) 59(5,2.5) 60(4.5,2.5) 61(4,2.5) 62(3.5,2.5) 63(3,2.5) 64(2.5,2.5)
  silkscreen extent 1.59,-8.41 10.91,0.91
LT-DD-12_V [mm] "SON, 12-Leads, Body 3x3mm, Pitch 0.45mm, Thermal Pad 2.38x1.65mm"
  rect 0.7x0.25 smd: 1(-1.4,1.125) 2(-1.4,0.675) 3(-1.4,0.225) 4(-1.4,-0.225) 5(-1.4,-0.675) 6(-1.4,-1.125) 7(1.4,-1.125) 8(1.4,-0.675) 9(1.4,-0.225) 10(1.4,0.225) 11(1.4,0.675) 12(1.4,1.125)
  rect 1.65x2.38 smd: 13(0,0)
  silkscreen extent -2.1,1.5 -2,1.6, body extent -1.5,-1.5 1.5,1.5, height 0.8
MAXM-S8+4_M [mm] "SOIC, 8-Leads, Body 4.9x3.9mm, Pitch 1.27mm, IPC Low Density"
  oval 2.5x0.7 smd: 1(-2.45,1.905) 2(-2.45,0.635) 3(-2.45,-0.635) 4(-2.45,-1.905) 5(2.45,-1.905) 6(2.45,-0.635) 7(2.45,0.635) 8(2.45,1.905)
  silkscreen extent -2.57,-2.5 0.8,2.93, body extent -2,-2.5 2,2.5, height 1.75
MCRN-SOT23-5_V [mm] "SOT-23, 5-Leads, Body 3x1.7mm, Pitch 0.95mm"
  rect 1x0.66 smd: 1(-1.3,0.95) 2(-1.3,0) 3(-1.3,-0.95) 4(1.3,-0.95) 5(1.3,0.95)
  silkscreen extent -1.42,-1.5 0.4,1.95, body extent -1.5,-1.5 1.5,1.5, height 1.45
pq3230 [mm]
  round 1.5 hole 0.9: 1(0,0) 2(5.05,0) 3(10.1,0) 4(17.7,0) 5(22.75,0) 6(27.8,0) 7(27.8,30.3) 8(22.75,30.3) 9(17.7,30.3) 10(10.1,30.3) 11(5.05,30.3) 12(0,30.3)
  silkscreen extent -1.91,-1.52 30.29,32.68
RELAY-TH_SRD-XXVDC-XL-C [mil]
  round 110 hole 60: 1(-200.79,-236.22) 2(279.54,-236.2) 3(279.53,236.2) 4(-200.79,236.22) 5(-279.53,0)
  silkscreen extent -342,-307 413,307
RESC1608X055N_0603 [mil] "Chip Resistor, 0603"
  round 10 on Mech3: 0(0,0)
  rect 40x30 smd: 1(-30.98,0) 2(30.98,0)
  silkscreen extent -30,-29 30,29, body extent -31,-16 31,16, height 22
sma [mm]
  rect 2x2 smd: 1(0,0) 2(4,0)
  silkscreen extent -1.3,-1.5 5.3,1.5
SMA [mm]
  rect 2x2 smd: 1(0,0) 2(4,0)
  silkscreen extent -1.3,-1.5 5.3,1.5
SMB [mm]
  rect 2.2x2.8 smd: 1(0,0) 2(4.5,0)
  silkscreen extent -1.3,-1.8 5.8,1.8
SMC [mm]
  rect 2.5x3.3 smd: 1(0,0) 2(6.75,0)
  silkscreen extent -0.35,-3.25 7.15,3.25
so-8 [mil]
  rect 55x25 smd: 1(0,0)
  oval 55x25 smd: 2(0,-50) 3(0,-100) 4(0,-150) 5(226.38,-150) 6(226.38,-100) 7(226.38,-50) 8(226.38,0)
  silkscreen extent 43,-175 183,25
SO-8 [mil]
  rect 55x25 smd: 1(0,0)
  oval 55x25 smd: 2(0,-50) 3(0,-100) 4(0,-150) 5(226.38,-150) 6(226.38,-100) 7(226.38,-50) 8(226.38,0)
  silkscreen extent 43,-175 183,25
SOD323 [mm]
  rect 0.65x1.35 smd: 1(0,0) 2(2.4,0)
  silkscreen extent -0.03,-0.8 2.44,0.8
sop4 [mil]
  rect 80x30 smd: 1(0,0) 2(0,-100) 3(250,-100) 4(249,0)
  silkscreen extent 76,-125 176,21
SOP16-T [mm]
  rect 1.2x0.8 smd: 1(0,0) 2(0,-1.27) 3(0,-2.54) 4(0,-3.81) 5(0,-5.08) 6(0,-6.35) 7(0,-7.62) 8(0,-8.89) 9(6.3,-8.89) 10(6.3,-7.62) 11(6.3,-6.35) 12(6.3,-5.08) 13(6.3,-3.81) 14(6.3,-2.54) 15(6.3,-1.27) 16(6.3,0)
  silkscreen extent 1.41,-9.53 4.89,0.64
SOP127P600X168_HS-8N [mm] "SOP, 8-Leads, Body 5.0x4.0mm (max), Pitch 1.27mm, IPC Medium Density"
  oval 1.75x0.6 smd: 1(-2.6,1.905) 2(-2.6,0.635) 3(-2.6,-0.635) 4(-2.6,-1.905) 5(2.6,-1.905) 6(2.6,-0.635) 7(2.6,0.635) 8(2.6,1.905)
  rect 1.9x3 smd: 9(0,0)
  silkscreen extent -2.72,-2.5 1.33,2.88, body extent -2,-2.5 2,2.5, height 1.68
SOT23-3 [mm]
  rect 1x0.6 smd: 1(0,0) 2(0,2) 3(-2.5,1)
  silkscreen extent -2.1,-0.5 -0.5,2.5
sot-23-5 [mm]
  rect 1.2x0.5 smd: 1(-1.3,1) 2(-1.3,0) 3(-1.3,-1) 4(1.3,-1) 5(1.3,1)
  silkscreen extent -2.2,-1.7 2.2,1.7
TEST_P [mm]
  rect 0.5x0.8 smd: 1(0,0) 2(0.75,0)
  silkscreen extent -0.62,-0.4 1.37,0.4
TO-277B_3P-L6.1-W4.3-LS7.0-BR [mm]
  rect 1.29x1.422 smd: 1(1.933,-1.05) 2(1.933,1.05)
  rect 4.8x3.8 smd: 3(-1.933,0)
  silkscreen extent -3.95,-2.2 2.25,2.2
TPD [mm]
  round 1 smd: 1(0,0)
TSSOP14 [mil]
  rect 66x14 smd: 1(-111,76.77) 2(-111,51.18) 3(-111,25.59) 4(-111,0) 5(-111,-25.59) 6(-111,-51.18) 7(-111,-76.77) 8(111,-76.77) 9(111,-51.18) 10(111,-25.59) 11(111,0) 12(111,25.59) 13(111,51.18) 14(111,76.77)
  silkscreen extent -88,-100 88,100
TY-100P [mm]
  round 1.8 hole 1.2: 1(0,0) 2(10.7,0) 3(10.7,-5.08) 4(0,-5.08)
  silkscreen extent -4.15,-8.08 14.86,2.96
TYPEC_16P [mm]
  oval 1x2.1 hole 0.65 slot 1.7 at 90 deg: 1(-4.32,-0.391) 1(-4.32,3.759) 1(4.32,-0.391) 1(4.32,3.759)
  round 0.67 hole 0.67: 2(-2.89,3.259) 2(2.89,3.259)
  rect 0.3x1 smd: A1(-3.05,4.293) A4(-2.25,4.293) A5(-1.25,4.293) A6(-0.25,4.293) A7(0.25,4.293) A8(1.25,4.293) A9(2.25,4.293) A12(3.35,4.293) B1(3.05,4.293) B4(2.55,4.293) B5(1.75,4.293) B6(0.75,4.293) B7(-0.75,4.293) B8(-1.75,4.293) B9(-2.55,4.293) B12(-3.35,4.293)
  silkscreen extent -4.44,-1.73 4.49,5.07
Φ10×10 [mm]
  oval 1.524x4 smd: 1(0,4.25) 2(0,-4.25)
  silkscreen extent -5.15,-5.71 5.15,6.35
可视开关电源保险丝座 [mm]
  round 3 hole 1.7: 1(0,0) 2(22.4,0)
  silkscreen extent -2.69,-4.86 24.98,4.64

## Part data
C1 C2 C3 C4 C53 C59 C72 C73 C74 C75 C77 C78 C79 C80: library part CAP
C5 C6 C8 C9 C10 C11 C23 C25 C30 C31 C32 C33 C34 C35 C36 C37 C43 C57 C58 C63 C64: library part Cap, "Capacitor", LatestRevisionDate=17-Jul-2002, LatestRevisionNote="Re-released for DXP Platform.", PackageDescription="Radial Cap, Thru-Hole; 2 Leads; 0.3 in Pin Spacing", PackageReference=RAD-0.3, Published=8-Jun-2000, Publisher="Altium Limited"
C7 C68 C69: "Capacitor, MLCC", Manufacturer="Murata Electronics", Package=0603, PartNumber=GRM188R61A106KE69D, TempCo=[tempco], Tolerance=[tol], Voltage Rating=[voltage], ComponentLink1Description=Datasheet, SupplierDescription="CAP CER 10UF 10V X5R 0603"
C12 C13 C14 C15 C16 C17 C18 C19 C26 C28 C38 C39: library part CAP, "Capacitor"
C20 C21 C22 C24 C27 C60 C65 C66: "Capacitor, MLCC", Package=0603, PartNumber=C0603C104M5RACTU, TempCo=[tempco], Tolerance=[tol], Voltage Rating=[voltage], ComponentLink1Description=Datasheet, SupplierDescription="CAP CER 0.1UF 50V X7R 0603"
C29: "Capacitor, MLCC", Package=0603, PartNumber=GRM188R61A106KE69D, TempCo=[tempco], Tolerance=[tol], Voltage Rating=[voltage], ComponentLink1Description=Datasheet, SupplierDescription="CAP CER 10UF 10V X5R 0603"
C40: "Capacitor, MLCC", Manufacturer="Murata Electronics", Package=10uF, PartNumber=GRM188R61A106KE69D, TempCo=[tempco], Tolerance=[tol], Voltage Rating=[voltage], ComponentLink1Description=Datasheet, SupplierDescription="CAP CER 10UF 10V X5R 0603"
C41 C44 C46 C49: library part "Cap Pol1", "Polarized Capacitor (Radial)", LatestRevisionDate=17-Jul-2002, LatestRevisionNote="Re-released for DXP Platform.", PackageReference=RB7.6-15, Published=8-Jun-2000, Publisher="Altium Limited"
C42: "Capacitor, MLCC", Manufacturer="Murata Electronics", Package=CGA2B3X7S2A682K050BB, PartNumber=GRM188R61A106KE69D, TempCo=[tempco], Tolerance=[tol], Voltage Rating=[voltage], ComponentLink1Description=Datasheet, SupplierDescription="CAP CER 10UF 10V X5R 0603"
C45 C47 C51: "Capacitor, MLCC", Manufacturer="Murata Electronics", Package=100nf, PartNumber=GRM188R61A106KE69D, TempCo=[tempco], Tolerance=[tol], Voltage Rating=[voltage], ComponentLink1Description=Datasheet, SupplierDescription="CAP CER 10UF 10V X5R 0603"
C48: "Capacitor, MLCC", Manufacturer="Murata Electronics", Package=1uF, PartNumber=GRM188R61A106KE69D, TempCo=[tempco], Tolerance=[tol], Voltage Rating=[voltage], ComponentLink1Description=Datasheet, SupplierDescription="CAP CER 10UF 10V X5R 0603"
C50: "Capacitor, MLCC", Manufacturer="Murata Electronics", Package=51pF, PartNumber=GRM188R61A106KE69D, TempCo=[tempco], Tolerance=[tol], Voltage Rating=[voltage], ComponentLink1Description=Datasheet, SupplierDescription="CAP CER 10UF 10V X5R 0603"
C52: "Capacitor, MLCC", Manufacturer="Murata Electronics", Package=33nF, PartNumber=GRM188R61A106KE69D, TempCo=[tempco], Tolerance=[tol], Voltage Rating=[voltage], ComponentLink1Description=Datasheet, SupplierDescription="CAP CER 10UF 10V X5R 0603"
C54 C55 C56: library part Capacitor_0603, "Capacitor, MLCC", Manufacturer=muRata, Package=0603, PartNumber=GQM2195C2E4R7CB12J, TempCo=[tempco], Tolerance=[tol], Voltage Rating=[voltage], ComponentLink1Description=Datasheet, SupplierDescription="CAP CER 1nF 50V X7R 0603"
C61 C62: Package=0603, PartNumber=C0603C104M5RACTU, TempCo=[tempco], Tolerance=[tol], Voltage Rating=[voltage], SupplierDescription="CAP CER 0.1UF 50V X7R 0603"
C67: "Capacitor, MLCC", Manufacturer=KEMET, Package=0603, PartNumber=C0603C104M5RACTU, TempCo=[tempco], Tolerance=[tol], Voltage Rating=[voltage], ComponentLink1Description=Datasheet, SupplierDescription="CAP CER 0.1UF 50V X7R 0603"
C70: "Capacitor, MLCC", Manufacturer="Murata Electronics", Package=0402, PartNumber=GRM155R71C104KA88J, TempCo=[tempco], Tolerance=[tol], Voltage Rating=[voltage], ComponentLink1Description=Datasheet, SupplierDescription="CAP CER 0.1UF 16V X7R 0402"
C71 C76: Package=1206, PartNumber=C1206C106M3PACTU, TempCo=[tempco], Tolerance=[tol], Voltage Rating=[voltage], SupplierDescription="CAP CER 10UF 25V X5R 1206"
D1: Minimum Operating Temperature=-65C, Package / Case=SOD-323, Package Description="2-Pin Surface Mount Device, Body 1.7 x 1.3 mm", Package Reference=SOD323-2, Pd - Power Dissipation=200mW, Voltage Temperature Coefficient=0.25mV/C, Voltage Tolerance=5%, Vz - Zener Voltage=12V, Zener Current=5mA, Mounting Style=SMD/SMT, Mounting Technology=SurfaceMount, Package URL=http://www.vishay.com/docs/71192/71192.pdf, Packaging=Reel, Product Category=ZenerDiodes, RoHS=True, Series=BZT52C12, Termination Style=SMD/SMT, Unit Weight=0.000173oz, Width=1.4mm, Zz - Zener Impedance=40Ohms
D2 D3 D4 D29 D30: library part "DIODE S"
D5: library part "Diode 1N4001", "1 Amp General Purpose Rectifier", Code_JEDEC=DO-204-AL, ComponentLink1Description="Manufacturer Link", ComponentLink1URL=http://www.fairchildsemi.com/, ComponentLink2Description=Datasheet, ComponentLink2URL=http://www.fairchildsemi.com/ds/1N%2F1N4001.pdf, DatasheetVersion=1998, LatestRevisionDate=17-Jul-2002, LatestRevisionNote="Re-released for DXP Platform.", PackageReference=DO-41, PackageVersion=Aug-1999, Published=8-Jun-2000, Publisher="Altium Limited"
D6 D7: library part Diode, "Default Diode", Code_JEDEC=DO-214-AB, LatestRevisionDate=17-Jul-2002, LatestRevisionNote="Re-released for DXP Platform.", PackageReference=SMC, PackageVersion=Sep-1996, Published=8-Jun-2000, Publisher="Altium Limited"
D8 D9 D10 D11 D12 D13 D14 D15 D16 D17: "VISHAY,LL4148,圆柱体MiniMELF100V/2A,ROHS", 制造商=VISHAY, 名称=快速开关二极管, 版本=V1.00, 物料编号=APLLY
D18: Average Rectified Current (Io)=12A, Forward Voltage (Vf@If)=670mV@12A, JLCPCB Part Class="Extended Part", LCSC Part Name="电压:100V 电流:12A", Manufacturer=PANJIT(强茂), Reverse Leakage Current (Ir)=100uA@100V, Reverse Voltage (Vr)=100V, Add into BOM=yes, Convert to PCB=yes, Datasheet=https://atta.szlcsc.com/upload/public/pdf/source/20191009/C391735_74715AF6864FC3D0E0C927F6D6BDC70E.pdf, Device=SVT12100VB_R2_00001, Manufacturer Part=SVT12100VB_R2_00001, Supplier=LCSC, Supplier Footprint=TO-277B, Supplier Part=C391735, Symbol=SVT12100VB_R2_00001
D19: Average Rectified Current (Io)=10A, Forward Voltage (Vf@If)=1.1V@5A, JLCPCB Part Class="Extended Part", LCSC Part Name="电压:800V 电流:10A", Manufacturer=YANGJIE(扬杰), Operating Temperature=-55℃~+150℃@(Tj), Peak Forward Surge Current=170A, Reverse Leakage Current (Ir)=10uA@800V, Reverse Voltage (Vr)=800V, Add into BOM=yes, Convert to PCB=yes, Datasheet=https://atta.szlcsc.com/upload/public/pdf/source/20200429/C525723_C60B0D61B4DEC997859D4E414530B852.pdf, Device=KBU1008, Manufacturer Part=KBU1008, Supplier=LCSC, Supplier Footprint=KBU, Supplier Part=C781391, Symbol=KBU1008-A2-0000
D20 D21 D22 D23 D24 D25: library part "DIODE S", "Schottky Diode"
D26 D27 D28: library part LL4148, 制造商=VISHAY, 名称=快速开关二极管, 版本=V1.00, 物料编号=APLLY
F1: library part "Fuse 1", "Fuse", LatestRevisionDate=17-Jul-2002, LatestRevisionNote="Re-released for DXP Platform.", PackageDescription="Thru-Hole; 2 Leads", PackageReference=PIN-W2/E2.8, Published=8-Jun-2000, Publisher="Altium Limited"
FB1 FB2 FB3: library part FB, FB=BLM18BD102SN1(muRata), Part Field 1="磁珠/0603/1K ohm/100MHz", Text Field1=FB
L1 L2: library part 1276AS-H-100M=P2, PartNumber=1276AS-H-100M=P2, Rated Current="250 mA", Mounting Technology="Surface Mount", PackageDescription="2-Pin SMT Inductor, 3.2 x 2.5 mm Body", PackageReference=IND1210
P2 P3 P9: "Header, 5-Pin", LatestRevisionDate=17-Jul-2002, LatestRevisionNote="Re-released for DXP Platform.", Publisher="Altium Limited"
P5 P7: "Header, 4-Pin", LatestRevisionDate=17-Jul-2002, LatestRevisionNote="Re-released for DXP Platform.", Publisher="Altium Limited"
P6: "Header, 9-Pin", LatestRevisionDate=17-Jul-2002, LatestRevisionNote="Re-released for DXP Platform.", Publisher="Altium Limited"
P8 P10: "Header, 2-Pin", LatestRevisionDate=17-Jul-2002, LatestRevisionNote="Re-released for DXP Platform.", Publisher="Altium Limited"
Q1 Q2 Q3 Q4: library part NPN_MMBT3904
Q5 Q7: library part PUT, "Programmable Unijunction Transistor", LatestRevisionDate=17-Jul-2002, LatestRevisionNote="Re-released for DXP Platform.", PackageReference=TO-52, Published=8-Jun-2000, Publisher="Altium Limited"
Q6 Q8 Q9 Q10 Q11 Q12: library part BUK92150-55A, "BUK92150-55A", ComponentLink1Description="Manufacturer Link", ComponentLink1URL=http://www.vishay.com/, ComponentLink2Description=Datasheet, ComponentLink2URL=http://www.vishay.com/docs/70192/70192.pdf, DatasheetVersion=6-Oct-1997, LatestRevisionDate=17-Jul-2002, LatestRevisionNote="Re-released for DXP Platform.", PackageDescription="SOT-457/SC-74; 6 Leads; Body 3.1 x 3 mm, inc. leads (LxW max)", PackageReference=TSOP-6, PackageVersion=Aug-1998, Published=8-Jun-2000, Publisher="Altium Limited"
R1 R15 R16 R18 R19 R20 R22 R23 R25 R26 R27 R28 R29 R30 R31 R32 R33 R34 R35 R36 R37 R40 R41 R42 R43: library part Res0805M
R2 R3 R73 R74 R78 R79 R80: library part R
R4 R5 R7 R12 R13 R14 R48: library part RES0603, ID=233, 制造商=三星/YAGEO, 参数值=1.00E+04, 器件等级=——, 工作温度="–55°C to 155°C", 序号=109, 物料主编码(PN)=150000040, 物料名称=贴片电阻, 物料描述=RES,贴片电阻,0603,10k,±1%,1/10W,1.6X0.8X0.45mm,RC1608F103CS/RC0603FR-0710KL, 物料类型=表贴电阻, 精度=±1%, 规格型号(完整型号)=RC1608F103CS/RC0603FR-0710KL
R6 R8 R9 R10 R11 R44 R45: library part RES2
R17 R87 R89 R90: Package=0603, PartNumber=RC0603FR-1075KL, Power Rating=[power], TempCo=[tempco], Tolerance=tol, SupplierDescription="RES SMD 75K OHM 1% 1/10W 0603"
R21: "Resistor, Standard", Package=0603, PartNumber=RR0816P-103-D, TempCo=[tempco], Tolerance=tol, ComponentLink1Description=Datasheet, SupplierDescription="RES SMD 10K OHM 0.5% 1/16W 0603"
R24 R38 R39 R92 R93 R94: library part Res2, "Resistor", LatestRevisionDate=17-Jul-2002, LatestRevisionNote="Re-released for DXP Platform.", PackageReference=AXIAL-0.4, Published=8-Jun-2000, Publisher="Altium Limited"
R46 R49 R52 R53: library part "Res Varistor", "Varistor (Voltage-Sensitive Resistor)", Code_IPC=RESC2012, LatestRevisionDate=29-May-2009, LatestRevisionNote="IPC-7351 Footprint Added.", PackageDescription="Chip Resistor 0805 Case Size", PackageReference=6-0805, PackageVersion=Mar-2003, Published=24-Mar-1999, Publisher="Altium Limited"
R47 R50 R51 R54 R55 R56 R57 R58 R59 R60 R61 R62 R63 R64 R65 R66 R81: library part R, "R"
R67 R68 R69 R70 R71 R72: "Resistor, Standard", Manufacturer=Yageo, Package=0603, PartNumber=RC0603FR-0710KL, Power Rating=[power], TempCo=[tempco], Tolerance=tol, ComponentLink1Description=Datasheet, SupplierDescription="RES SMD 10K OHM 1% 1/10W 0603"
R75 R77: "Resistor, Standard", Package=0603, PartNumber=RC0603FR-0710KL, TempCo=[tempco], Tolerance=tol, ComponentLink1Description=Datasheet, SupplierDescription="RES SMD 10K OHM 1% 1/10W 0603"
R76: "Resistor, Standard", Package=0603, PartNumber=RC0603FR-07100RL, TempCo=[tempco], Tolerance=tol, ComponentLink1Description=Datasheet, SupplierDescription="RES SMD 100 OHM 1% 1/10W 0603"
R82 R83 R84 R85: library part Res1, "Resistor", LatestRevisionDate=17-Jul-2002, LatestRevisionNote="Re-released for DXP Platform.", PackageReference=AXIAL-0.3, Published=8-Jun-2000, Publisher="Altium Limited"
R86: library part Resistor_0603, "Resistor, Standard", Manufacturer=Yageo, Package=0603, PartNumber=RC0603FR-0710KL, Power Rating=[power], TempCo=[tempco], Tolerance=tol, ComponentLink1Description=Datasheet, SupplierDescription="RES SMD 10K OHM 1% 1/10W 0603"
R88 R91: library part Res1, PackageReference=AXIAL-0.3, Published=8-Jun-2000, Publisher="Altium Limited"
RLY1 RLY2: Coil Rated Power=360mW, Coil Resistance=70Ω, Coil Voltage=5V, Contact Rating=-, Contact Resistance=100mΩ, JLCPCB Part Class="Extended Part", LCSC Part Name=蓝色, Manufacturer=松乐, Maximum Switching Current=15A, Maximum Switching Voltage=250V@AC, Add into BOM=yes, Coil Type=无极性-单线圈, Contact Form=一组转换:1C(单刀双掷-转换), Convert to PCB=yes, Datasheet=https://atta.szlcsc.com/upload/public/pdf/source/20200305/C490149_C96E4098A3B1FFB377D5AD2E40B7C2A8.pdf, Device=SRD-05VDC-SL-C, Manufacturer Part=SRD-05VDC-SL-C, Operate Time=10ms, Pin Number=5, Release Time=10ms, Supplier=LCSC, Supplier Footprint=插件,15.6x19.2mm, Supplier Part=C35449, Symbol=SRD-05VDC-SL-C
SC1: library part "Cap Pol2", "Polarized Capacitor (Axial)", LatestRevisionDate=17-Jul-2002, LatestRevisionNote="Re-released for DXP Platform.", PackageReference=POLAR0.8, Published=8-Jun-2000, Publisher="Altium Limited"
U1: JLCPCB Part Class="Extended Part", LCSC Part Name="带DSP和FPU的170MHz主流ARM Cortex-M4 MCU，具有128 KB Flash存储器、数学加速器和中等模拟电平集成", Low-Voltage Detect=有, Manufacturer=ST(意法半导体), Operating Temperature Range=-40℃~+85℃, Operating Voltage Range=1.71V~3.6V, ADC (Bit)=12bit, Add into BOM=yes, Convert to PCB=yes, CPU Core=-, CPU Maximum Speed=170MHz, DAC (Bit)=12bit, Datasheet=https://atta.szlcsc.com/upload/public/pdf/source/20190925/C431633_8068E60CC825A086DCCD86A4BDED9458.pdf, Device=STM32G431RBT6, Direct Memory Access=有, GPIO Ports Number=52, Infrared Data Association=有, Internal Oscillator=有, Manufacturer Part=STM32G431RBT6, Program Storage Size=128KB, Supplier=LCSC, Supplier Footprint=LQFP-64(10x10), Supplier Part=C431633, Symbol=STM32G431RBT6, Watchdog=有
U3: library part ME6119C50M5G, "High Speed LDO Regulators, Low ESR, 5.0 V, 400 mA, -40 to 125 degC, 5-Pin SOT-23, RoHS, Tape and Reel", Case\/Package=SOT-23, Dropout Voltage=160mV, Max Input Voltage=5.5V, Max Operating Temperature=125degC, Min Current Limit=400mA, Min Input Voltage=2.5V, Min Operating Temperature=-40degC, Nominal Output Voltage=3.3V, Output Current=300mA, Package Description="5-Pin Small Outline Transistor, Body 1.6 x 2.9 mm, Pitch 0.95 mm", Datasheet URL=http://ww1.microchip.com/downloads/en/DeviceDoc/MIC550X.pdf, Datasheet Version="Rev. 2.3, 04/2015", Lead Free=LeadFree, Manufacturer URL=http://www.microchip.com/, Mount=SurfaceMount, Mounting Technology=SurfaceMount, Number of Pins=5, Number of Regulators=1, Output Voltage=3.3V, Package Reference=SOT-23, Packaging=CutTape, REACH SVHC=NoSVHC, RoHSCompliant=True
U4: "16-bit Analog-to-digital Converters, 12-pin SON (DD-12), 0 to 70 degC, Pb-Free, Tape and Reel", ComponentLink1Description="Manufacturer URL", ComponentLink1URL=http://www.linear.com/, ComponentLink2Description=Datasheet, ComponentLink2URL=https://www.analog.com/media/en/technical-documentation/data-sheets/24702fb.pdf, PartNumber=LTC2470CDD#TRPBF
U5: library part MAX908EPD, "Quad High-speed, Ultra Low-power, Single-Supply TTL comparator", Code_JEDEC=MS-001-AC, ComponentLink1Description="Manufacturer Link", ComponentLink1URL=http://www.maxim-ic.com/, ComponentLink2Description=Datasheet, ComponentLink2URL=http://pdfserv.maxim-ic.com/en/ds/MAX907-MAX909.pdf, DatasheetVersion=Jul-1994, LatestRevisionDate=29-May-2009, LatestRevisionNote="Component Body Added.", PackageDescription="DIP, 14-Pin, Row Spacing 7.62 mm, Pitch 2.54 mm", PackageReference=PD14, PackageVersion="RevB, 21-0043", Published=16-Jan-2001, Publisher="Altium Limited"
U6: "Micropower 100 mA Ultra Low-Dropout Regulator, 5-pin SOT-23, Pb-Free", ComponentLink1Description="Datasheet URL", ComponentLink1URL=http://www.ti.com/general/docs/lit/getliterature.tsp?genericPartNumber=LP2981-N&fileType=pdf
U7 U8: library part TLP281-4
U9 U10: library part Optoisolator1, "4-Pin Phototransistor Optocoupler", DatasheetVersion=Nov-2003, LatestRevisionDate=04-Mar-2005, LatestRevisionNote="Sch pins 3 & 4 Swapped.", PackageReference=DIP-4, Published=24-Mar-1999, Publisher="Altium Limited"
U11: library part TY-100P, "PCB mounting filters"
U12 U15 U16 U17 U21 U22 U23: JLCPCB Part Class="Extended Part", Manufacturer=VISHAY(威世), Add into BOM=yes, Convert to PCB=yes, Datasheet=https://atta.szlcsc.com/upload/public/pdf/source/20221230/028E61738915F263ABF2615161A8D7B6.pdf, Device=SIS110DN-T1-GE3, LCSC Part Name=SIS110DN-T1-GE3, Manufacturer Part=SIS110DN-T1-GE3, Supplier=LCSC, Supplier Footprint=SO-8, Supplier Part=C5334354, Symbol=SIS110DN-T1-GE3
U13: JLCPCB Part Class="Extended Part", Manufacturer=TI(德州仪器), Operating Temperature=-40℃~+105℃@(Ta), Supply Voltage=8V~21V, Switching Frequency=40kHz~130kHz, Add into BOM=yes, Convert to PCB=yes, Datasheet=https://www.ti.com/cn/lit/gpn/ucc28600, Device=UCC28600DR, Duty Cycle=99%, LCSC Part Name=UCC28600DR, Manufacturer Part=UCC28600DR, Output Isolation=隔离, Supplier=LCSC, Supplier Footprint=SOIC-8, Supplier Part=C28585, Symbol=UCC28600DR, Topology=反激式
U14: Collector-Emitter Saturation Voltage (Vce(sat)@Ic,IF)=300mV@1mA,10mA, Forward Voltage=1.35V, Input voltage type=DC, Isolation Voltage(rms)=3.75kV, JLCPCB Part Class="Extended Part", LCSC Part Name="DC输入 隔离电压(rms):3750V", Manufacturer=VISHAY(威世), Operating Temperature=-40℃~+100℃, Output Current=50mA, Receiving End Voltage=70V, Reverse Voltage=6V, Add into BOM=yes, Convert to PCB=yes, Datasheet=https://atta.szlcsc.com/upload/public/pdf/source/20170713/C118299_1499918878383816727.pdf, Device=TCMT1107, Fall Time=7us@2mA,100Ω, Manufacturer Part=TCMT1107, Number of Outputs=1, Output Type=光电三极管, Rise Time=5.5us@2mA,100Ω, Supplier=LCSC, Supplier Footprint=SOP-4-1.27mm, Supplier Part=C81148, Symbol=TCMT1107
U18 U19 U20: JLCPCB Part Class="Extended Part", Manufacturer=Infineon(英飞凌), Operating Temperature=-40℃~+150℃@(Tj), Peak Output Current(sink)=4A, Supply Voltage=10V~20V, Add into BOM=yes, Convert to PCB=yes, Datasheet=https://atta.szlcsc.com/upload/public/pdf/source/20161024/1477287953380.pdf, Device=IRS21867STRPBF, Driven Configuration=半桥, Fall Time=18ns, LCSC Part Name=IRS21867STRPBF, Load Type=MOSFET；IGBT, Manufacturer Part=IRS21867STRPBF, Number of Drivers=2, Peak Output Current(source)=4A, Rise Time=22ns, Supplier=LCSC, Supplier Footprint=SOIC-8, Supplier Part=C52290, Symbol=IRS21867STRPBF
U24: library part MAX33071EASA+, "RS-485 Half-Duplex Transceiver with ±65V Fault Protection,+3V to +5.5V, -40 to 125 degC, 8-Pin SOIC (S8+4), RoHS, Tube", ComponentLink1Description="Manufacturer URL", ComponentLink1URL=http://www.maximintegrated.com/, ComponentLink2Description=Datasheet, ComponentLink2URL=https://datasheets.maximintegrated.com/en/ds/MAX33070E-MAX33071E.pdf, PartNumber=MAX33071EASA+, Vin="3.2 to 12.6 V", Vout="3.000 V"
U25: library part AD8615
U26 U27: library part LM22676MR-5.0
X1: library part XTAL, "Crystal Oscillator", LatestRevisionDate=17-Jul-2002, LatestRevisionNote="Re-released for DXP Platform.", PackageReference=R38, Published=8-Jun-2000, Publisher="Altium Limited"
Y1: library part XTAL
LD1 LD2 LD3: ID=6, 制造商=Everlight, 器件等级=——, 工作温度="–40°C to 85°C", 序号=33, 物料主编码(PN)=100000032, 物料名称=绿色LED, 物料描述=Other,LED,绿色,0603,1.6X0.8X0.4mm,19-217/G7C-AN1P2/3T, 物料类型=特殊二极管, 规格型号(完整型号)=19-217/G7C-AN1P2/3T
P1 P4: Publisher="Altium Limited"

## Via types
v1: diameter 24, hole 12, Top Layer to Bottom Layer, 4 vias
v2: diameter 59.06, hole 39.37, Top Layer to Bottom Layer, 2 vias

## Nets (pads, with @x,y where several pads share a name; then routed paths per layer and width w, separated by ;. In a path a pad name is that pad's centre, name@x,y a point inside that pad or via, vN(x,y) a via of type N, cw(c..) or ccw(c..) an arc to the next point about the centre after c; other vN are vias at no path point)
3.3V_ADC: C61.1 C62.1 FB3.2 U25.5
3.3V_ISO: C60.1 C66.1 C69.1 C70.1 FB1.1 FB2.1 FB3.1 R6.1 R10.2 R11.2 R27.1 R29.1 R31.1 R33.1 R35.1 R37.1 R41.1 R44.2 R45.2 R75.2 R82.1 T5.1 U3.5 U24.8
24V_F: C12.2 C13.2 C14.2 C15.2 C30.1 C31.1 C32.1 C33.1 C34.1 C35.1 C36.1 C37.1 C79.2 C80.1 D8.2 D9.2 D10.2 D11.2 D12.2 D13.2 D15.2 D16.2 D17.2 L2.2 R26.2 R28.2 R30.2 R32.2 R34.2 R36.2 R40.2 R42.2 R43.2 R90.1 RLY1.4 RLY2.4 U2.24
+3.3VA: C21.1 C29.1 U4.12 U6.5
AC_L: C43.2 C57.2 D19.2 U11.4
AC_N: C57.1 C58.1 D19.3 U11.3
Adc_input: C23.2 R21.1 T8.1 U5.8 U5.9
AGND: C14.1 C15.1 C16.2 C17.2 C18.1 C19.1 C20.2 C21.2 C22.2 C24.2 C25.1 C27.2 C29.2 C65.2 P5.2 P5.4 R16.2 R20.1 R25.2 U2.1 U2.4 U2.5 U2.11 U2.12 U4.7 U4.8 U4.10 U4.11 U4.13 U5.11 U6.2
  other v1: 10405.32,1225.31 10444.68,1225.31 10405.32,1264.68 10444.68,1264.68
AI0: D6.1 P5.3 T7.1
AO_BOOST: Q4.3 U2.20
AO_IOUT: C19.2 Q4.1 R18.1 U2.19
BOOT0: P1.2 R3.1 U1.61
DI_0: C31.2 D9.1 P6.1 U8.2
DI_1: C33.2 D11.1 P6.2 U8.4
DI_2: C35.2 D13.1 P6.3 U8.6
DI_3: C37.2 D15.1 P6.4 U8.8
DI_4: C36.2 D8.1 P6.5 U7.2
DI_5: C34.2 D10.1 P6.6 U7.4
DI_6: C32.2 D12.1 P6.7 U7.6
DI_7: C30.2
DI_IN0: R29.2 U1.41 U8.16
DI_IN1: R33.2 U1.40 U8.14
DI_IN2: R37.2 U1.42 U8.12
DI_IN3: R41.2 U1.22 U8.10
DI_IN4: R27.2 U1.24 U7.16
DI_IN5: R31.2 U1.25 U7.14
DI_IN6: R35.2 U1.26 U7.12
DIN_AO: U1.53 U2.9
DO0: C38.1 D16.1 RLY1.1 U9.4
DO1: C39.1 D17.1 RLY2.1 U10.4
DO_ctrl_0: U1.14 U9.2
DO_ctrl_1: U1.15 U10.2
DOUT_AO: U1.54 U2.10
EA: P3.3 Q6.2
EARTH: J1.1 R53.1
EB: P3.4 Q8.2
EXTPROC_RS485_DIRECTION: R77.2 U1.17 U24.2 U24.3
EXTPROC_SPI2_ADC_CS3: U1.34 U4.3
EXTPROC_SPI2_MISO: U1.36 U4.6
EXTPROC_SPI2_MOSI: U1.37 U4.4
EXTPROC_SPI2_SCLK: U1.35 U4.5
EZ: P3.5 Q9.2
FAULT: R12.1 U1.30
GND: C1.2 C2.2 C3.1 C4.1 C5.2 C6.2 C7.2 C8.1 C9.1 C10.1 C11.1 C26.1 C28.2 C40.2 C41.2 C48.2 C53.1 C59.1 C60.2 C61.2 C62.2 C64.1 C66.2 C67.2 C68.2 C71.2 C73.1 C74.1 C75.2 C76.2 C78.1 C79.1 C80.2 D2.1 D3.1 D4.1 D24.1 D29.1 D30.1 J1.A1 J1.A12 J1.B1 J1.B12 P2.2 P3.2 P4.3 P6.9 Q1.2 Q2.2 Q3.2 Q5.3 Q7.3 R3.2 R17.2 R25.1 R66.2 R77.1 R79.2 R85.2 R86.1 R89.2 SC1.2 SW1.C SW1.E T1.7 T1.8 T1.9 T3.1 U1.27 U1.31 U1.47 U1.63 U3.2 U7.11 U7.13 U7.15 U8.9 U8.11 U8.13 U8.15 U9.3 U10.3 U18.4 U19.4 U20.4 U24.5 U25.2 U26.6 U26.9 U27.6 U27.9
  other v2: 9200,2455 10995,17060
HU: P2.3 Q10.2
HV: P2.4 Q11.2
HW: P2.5 Q12.2
IOUT0: C18.2 D5.1 Q4.2 R18.2
is_adc: R73.1 R78.1 U25.1
ISEN: R80.2 R86.2 T9.1 U21.1 U21.2 U21.3 U22.1 U22.2 U22.3 U23.1 U23.2 U23.3
KEYA: C26.2 R8.1 U1.59
KEYB: C28.1 R9.1 U1.60
KEYSW: R6.2 SW1.D U1.44
LATCH_AO: U1.56 U2.7
LCD_CLK: U1.33
LCD_CS: U1.39
LCD_SID: U1.21
MCU_3.3V: C7.1 C8.2 C9.2 C10.2 C11.2 D1.1 FB1.2 P4.1 R2.1 R74.1 U1.16 U1.29 U1.32 U1.48 U1.64
MCU_REF: Q7.2 R82.2 R83.1 U1.28
mcu_rst: C59.2 R74.2 U1.7
MCU_UH: U1.8 U18.2
MCU_UL: U1.62 U18.3
MCU_VH: U1.9 U19.2
MCU_VL: U1.58 U19.3
MCU_WH: U1.10 U20.2
MCU_WL: U1.57 U20.3
MEA: Q6.3 R24.2 S_RX.1 U1.19
MEB: Q8.3 R38.2 S_RX1.1 U1.13
MEZ: Q9.3 R39.2 S_RX2.1 U1.51
Motor_U: C54.1 P9.3 T10.1 U15.1 U15.2 U15.3 U18.6 U21.5